# Altium PCB Smart Agriculture Board.PcbDoc
Units mil, origin at the board's own origin, x right, y up, seen from the top; angles counter-clockwise.
Board outline 6440 x 2515 mil, 2 copper layers (Top Layer, Bottom Layer); 39 components, 25 nets, 142 pads, 30 vias.
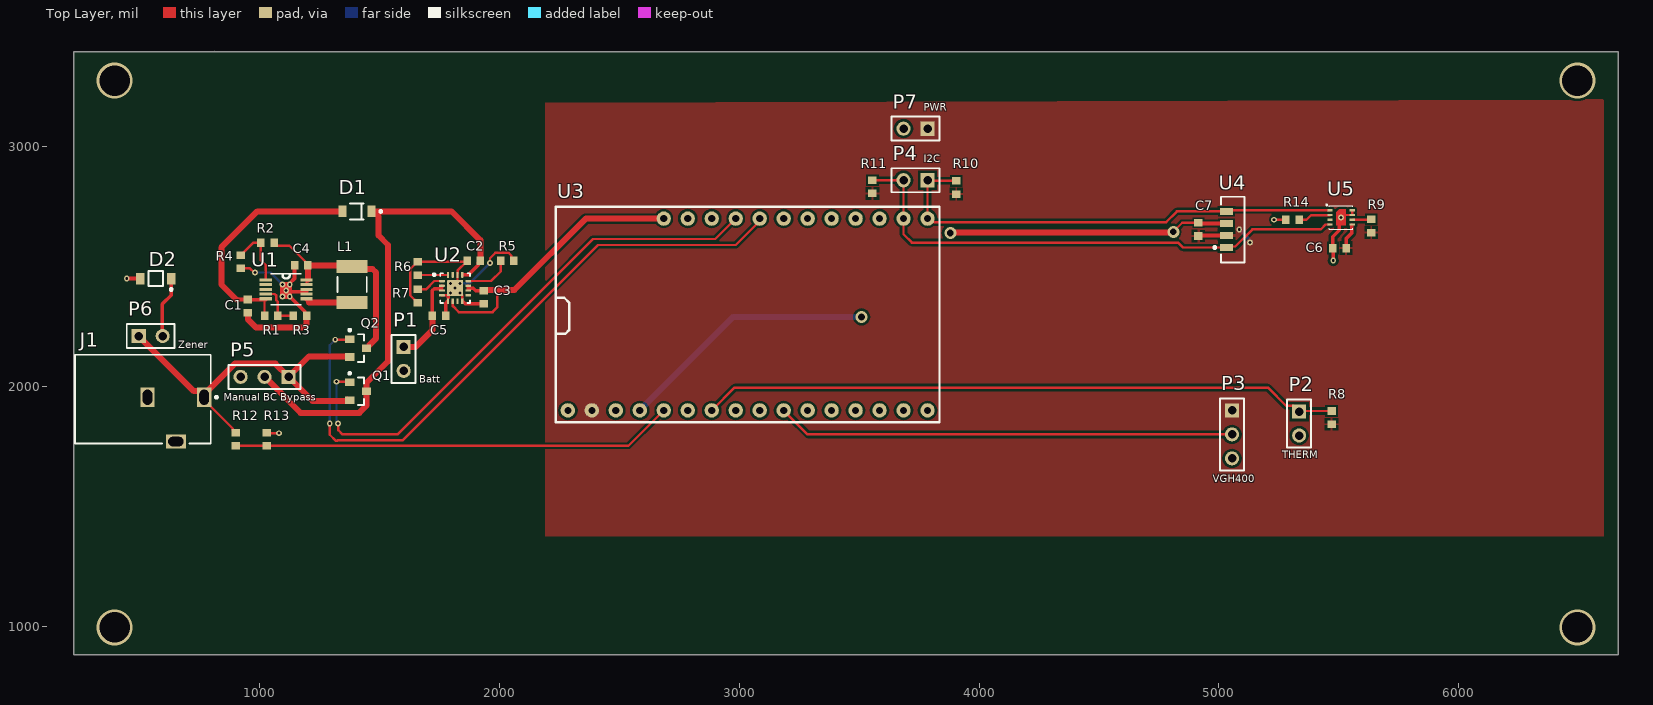
[diagram p0: Top Layer view]
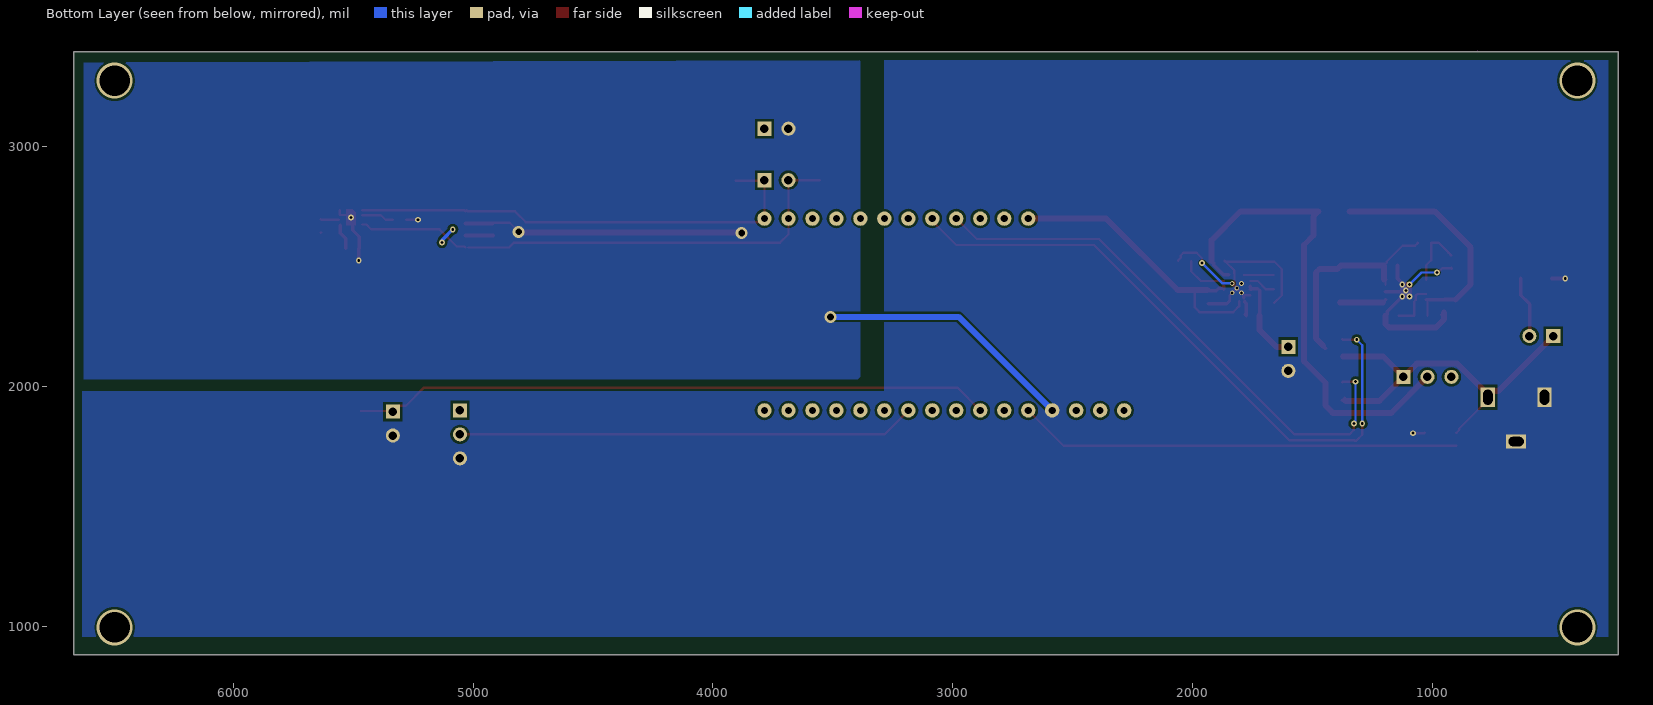
[diagram p1: Bottom Layer view, seen from below]

## Layer stack, top to bottom
Top Solder: solder mask 0.4, Solder Resist, Dk 3.5
Top Layer: signal copper 1.4
Dielectric 1: dielectric 12.6, FR-4, Dk 4.8
Bottom Layer: signal copper 1.4
Bottom Solder: solder mask 0.4, Solder Resist, Dk 3.5

## Board outline
225,880 6665,880 6665,3395 225,3395
cut-out: 810,3400

## Design rules (kind name [scope] priority, off if disabled: settings)
Clearance [All] p1: gap=10 ignorepadtopadclearanceinfootprint=FALSE except(0: Arc-Hole Track-Hole SMDPad-Hole THPad-Hole Via-Hole Fill-Hole Poly-Hole Region-Hole Text-Hole; 5: SMDPad-SMDPad; 8: Arc-SMDPad Track-SMDPad SMDPad-THPad SMDPad-Via SMDPad-Fill SMDPad-Poly SMDPad-Region SMDPad-Text)
HoleSize [All] p1: absolutevalues=TRUE maxlimit=247 minlimit=1 maxpercent=80.000 minpercent=20.000
MinimumSolderMaskSliver [All] p1: minsoldermaskwidth=2
PasteMaskExpansion [All] p1: expansion=2
PolygonConnect [All] p1: thpad.connectstyle=Direct thpad.reliefconductorwidth=10 thpad.reliefentries=4 thpad.polygonreliefangle="90 Angle" thpad.airgapwidth=10 smdpad.connectstyle=Relief smdpad.reliefconductorwidth=10 smdpad.reliefentries=4 smdpad.polygonreliefangle="90 Angle" smdpad.airgapwidth=10 via.connectstyle=Direct via.reliefconductorwidth=10 via.reliefentries=4 via.polygonreliefangle="90 Angle" via.airgapwidth=10
RoutingVias [All] p1: holewidth=28 width=50 viastyle="Through Hole" minholewidth=28 minwidth=50 maxholewidth=28 maxwidth=50
SilkToSilkClearance [All] p1: silktosilkclearance=3
SilkToSolderMaskClearance [IsPad] p1: minsilkscreentomaskgap=6 clearancetoexposedcopper=TRUE
SolderMaskExpansion [All] p1: expansion=2 istentingtop=FALSE
Width [All] p1: maxlimit=50 minlimit=5 preferedwidth=15 toplayer_prefwidth=10 bottomlayer_minwidth=10 minimp=50.000000 maximp=50.000000 favimp=50.000000
25 further rules are at their usual default settings.

## Components (designator, comment, footprint, x,y, rotation, side; value= is the part's Value field where it differs from the comment)
C1 "" 1608[0603] 950,2335 r90 top value=10uF
C2 "" 1608[0603] 1892.28,2524.68 r0 top value=1uF
C3 "" 1608[0603] 1934.72,2372.13 r90 top value=4.7uF
C4 "" 1608[0603] 1172.56,2505 r0 top value=10uF
C5 "" 1608[0603] 1747.44,2295 r180 top value=4.7uF
C6 "" 1608[0603] 5503.03,2576.98 r0 top value=100nF
C7 "" 1608[0603] 4915,2655 r270 top value=100nF
D1 "RB161MM-20TR" FP-PMDU-MFG 1405,2730 r180 top
D2 "MMSZ5233BT1G" ONSC-SOD-123-2-425-04_V 565.98,2450 r180 top
J1 "PJ-102B" CUI-PJ-102B_V 650,1955 r180 top
L1 "" 1812 1385,2425 r270 top value=4.7uH
P1 "Battery" HDR1X2 1600,2165 r270 top
P2 "Thermistor" HDR1X2 5335,1895 r270 top
P3 "VGH400" HDR1X3 5055,1900 r270 top
P4 "I2C Breakout" HDR1X2 3785,2860 r180 top
P5 "BC Manual Bypass" HDR1X3 1120,2040 r180 top
P6 "Zener Opt" HDR1X2 495,2210 r0 top
P7 "PWR Breakout" HDR1X2 3785,3075 r180 top
Q1 "IRLML6402" INTR-SOT-23-3_V 1410,1980 r270 top
Q2 "IRLML6402" INTR-SOT-23-3_V 1410,2160 r270 top
R1 "" 1608[0603] 1047.44,2295 r180 top value=1.5M
R2 "" 1608[0603] 1032.44,2600 r0 top value=4.7k
R3 "" 1608[0603] 1167.44,2295 r180 top value=360k
R4 "" 1608[0603] 920,2520 r90 top value=4.7k
R5 "" 1608[0603] 2032.28,2524.69 r180 top value=2.2k
R6 "" 1608[0603] 1659.72,2492.13 r270 top value=2.2k
R7 "" 1608[0603] 1659.72,2377.24 r90 top value=10k
R8 "" 1608[0603] 5470,1870 r270 top value=10k
R9 "" 1608[0603] 5635.59,2669.42 r270 top value=10k
R10 "" 1608[0603] 3905,2830 r270 top value=4.7k
R11 "" 1608[0603] 3555,2832.56 r270 top value=4.7k
R12 "Res1" 1608[0603] 900,1780 r90 top value=10k
R13 "Res1" 1608[0603] 1030,1780 r270 top value=10k
R14 "" 1608[0603] 5307.44,2695 r0 top value=10k
U1 "MCP16414-I/UN" MSOP10_UN_MCH 1110,2405 r0 top
U2 "BQ24074RGTR" RGT0016C_V 1814.84,2409.84 r0 top
U3 "Feather M0 LoRa" FeatherM0LoRa 2285,1900 r90 top
U4 "VEML7700-TR" FP-6_550-5300_02-4-MFG 5058.55,2654.41 r90 top
U5 "SHT3x-DIS" SHT3x 5510,2705 r0 top

## Footprints (in the part's own frame and the unit in brackets; to place one, negate y for a bottom-side part, rotate by r counter-clockwise, add the part's x,y. Pads: shape width x height; smd on the part's side, far side on the other; paste and mask are expansions set on the pad)
1608[0603] [mm] "Chip Capacitor, Body 1.6x0.8mm, IPC High Density"
  rect 0.8x0.9 smd: 1(-0.7,0) 2(0.7,0)
  body extent -0.87,-0.48 0.87,0.48, height 1.3
1812 [mm] "Chip Capacitor, Body 4.5x3.2mm, IPC High Density"
  rect 1.4x3.3 smd: 1(-1.9,0) 2(1.9,0)
  silkscreen extent -0.8,-1.55 0.8,1.55, body extent -2.4,-1.7 2.4,1.7, height 1.4
CUI-PJ-102B_V [mm] "THD, 3-Leads, Body 14.4x9mm, Height 11mm"
  rect 1.5x2.1 hole 1 slot 1.6 at 90 deg: 1(-3,0) 2(3,0)
  rect 2.1x1.5 hole 1 slot 1.6 at 0 deg: 3(0,4.7)
  silkscreen extent -4.43,-4.5 10.7,4.9, body extent -3.7,-4.5 10.7,4.9, height 11
FeatherM0LoRa [mil]
  round 60 hole 30: 1(0,0) 2(0,-100) 3(0,-200) 4(0,-300) 5(0,-400) 6(0,-500) 7(0,-600) 8(0,-700) 9(0,-800) 10(0,-900) 11(0,-1000) 12(0,-1100) 13(0,-1200) 14(0,-1300) 15(0,-1400) 16(0,-1500) 17(800,-1500) 18(800,-1400) 19(800,-1300) 20(800,-1200) 21(800,-1100) 22(800,-1000) 23(800,-900) 24(800,-800) 25(800,-700) 26(800,-600) 27(800,-500) 28(800,-400)
  silkscreen extent -50,-1550 850,50
FP-6_550-5300_02-4-MFG [mm]
  rect 0.7x1.4 smd paste+0 mask+0: 1(-1.905,0.675) 2(-0.635,0.675) 3(0.635,0.675) 4(1.905,0.675)
  silkscreen extent -3.47,-1.25 3.47,2.05, body extent -3.57,-1.35 3.57,1.48, height 0.25
FP-PMDU-MFG [mm]
  rect 0.85x1.2 smd paste+0 mask+0: 1(-1.525,0) 2(1.525,0)
  silkscreen extent -2.65,-0.85 0.72,0.85, body extent -2.05,-0.95 2.05,0.95, height 0.25
HDR1X2 [mm] "Connector; Header; 2 Position"
  rect 1.5x1.5 hole 0.9: 1(0,0)
  round 1.5 hole 0.9: 2(2.54,0)
  silkscreen extent -1.27,-1.27 3.81,1.27
HDR1X3 [mm] "Connector; Header; 3 Position"
  rect 1.5x1.5 hole 0.9: 1(0,0)
  round 1.5 hole 0.9: 2(2.54,0) 3(5.08,0)
  silkscreen extent -1.27,-1.27 6.35,1.27
INTR-SOT-23-3_V [mm] "SOT23, 3-Leads, Body 2.92x1.3mm, Pitch 1.9mm"
  rect 0.802x0.972 smd: 1(-0.95,-0.885) 2(0.95,-0.885) 3(0,0.885)
  silkscreen extent -2.03,-1.01 1.46,0.64, body extent -1.46,-0.65 1.46,0.65, height 1.12
MSOP10_UN_MCH [mil]
  rect 51.5x13 smd: 1(-84.75,39.37) 2(-84.75,19.68) 3(-84.75,0) 4(-84.75,-19.68) 5(-84.75,-39.37) 6(84.75,-39.37) 7(84.75,-19.68) 8(84.75,0) 9(84.75,19.68) 10(84.75,39.37)
  silkscreen extent -64,-64 64,64
ONSC-SOD-123-2-425-04_V [mm] "SOD, 2-Leads, Body 2.69x1.6mm"
  rect 0.91x1.22 smd: 1(-1.635,0) 2(1.635,0)
  silkscreen extent -1.76,-0.8 0.78,1.28, body extent -1.35,-0.8 1.35,0.8, height 1.35
RGT0016C_V [mm] "QFN, 16-Leads, Body 3x3mm, Pitch 0.5mm, Thermal Pad 1.65x1.65mm"
  rrect40% 0.6x0.25 smd: 1(-1.4,0.75) 2(-1.4,0.25) 3(-1.4,-0.25) 4(-1.4,-0.75) 9(1.4,-0.75) 10(1.4,-0.25) 11(1.4,0.25) 12(1.4,0.75)
  rrect40% 0.25x0.6 smd: 5(-0.75,-1.4) 6(-0.25,-1.4) 7(0.25,-1.4) 8(0.75,-1.4) 13(0.75,1.4) 14(0.25,1.4) 15(-0.25,1.4) 16(-0.75,1.4)
  rrect6% 1.55x1.55 on Top Paste: 17(0,0)
  rrect6% 1.7x1.7 smd paste-0.85 mask+0: 17(0,0)
  silkscreen extent -2.35,-1.57 1.57,1.58, body extent -1.5,-1.5 1.5,1.5, height 1
SHT3x [mm]
  rrect50% 0.55x0.25 smd paste+0 mask+0.05: 1(-1.175,0.75)
  rrect20% 0.55x0.25 smd paste+0 mask+0.05: 2(-1.175,0.25) 3(-1.175,-0.25) 4(-1.175,-0.75) 5(1.175,-0.75) 6(1.175,-0.25) 7(1.175,0.25) 8(1.175,0.75)
  round 0.2 smd mask+0.05: 9(0,0)
  Top Layer region: 0.5,-0.85 -0.5,-0.85 -0.5,0.55 -0.2,0.85 0.5,0.85
  silkscreen extent -1.55,-1.25 1.25,1.35, body extent -1.25,-1.25 1.25,1.25, height 0.9

## Part data
C1 C2 C3 C4 C5 C6 C7: library part Cap, "Capacitor", LatestRevisionDate=17-Jul-2002, LatestRevisionNote="Re-released for DXP Platform.", PackageDescription="Radial Cap, Thru-Hole; 2 Leads; 0.3 in Pin Spacing", PackageReference=RAD-0.3, Published=8-Jun-2000, Publisher="Altium Limited"
D1: library part CMP-08971-000004-1, "DIODE SCHOTTKY 25V 1A PMDU", Forward Current=1A, Manufacturer=Rohm, Max Junction Temp=+125°C, Max Repetitive Reverse Voltage=25V, Max Surge Forward Current=30A, Package=PMDU, Peak Reverse Current=280uA, Reverse Voltage=20V, Temperature="to +125°C", Automotive=No, Category=Diode, ComponentLink2Description=Datasheet, ComponentLink2URL=https://www.rohm.com/datasheet/RB161MM-20/rb161mm-20tr-e, Device Class L1="Discrete Semiconductors", Device Class L2=Diodes, Device Class L3="Schottky Diodes", Digikey Description="DIODE SCHOTTKY 25V 1A PMDU", Height=0.9mm, Lead Free=Yes, Manufacturer Part Number=RB161MM-20TR, Mouser Description="RB161MM Series 25 V 1 A Surface Mount Schottky Barrier Diode - SOD-123FL", Octopart=https://octopart.com/rb161mm-20tr-rohm-50255147, RoHS=TRUE, Temperature Range High=+125°C
D2: library part CMP-1060-00590-1, "Zener Voltage Regulator, 500 mW, 2-Pin SOD-123, Pb-Free, Tape and Reel", Manufacturer="On Semiconductor", ComponentLink1Description="Manufacturer URL", ComponentLink1URL=http://www.onsemi.com/, ComponentLink2Description=Datasheet, ComponentLink2URL=http://www.onsemi.com/pub_link/Collateral/MMSZ5221BT1-D.PDF, ComponentLink3Description="Package Specification", ComponentLink3URL=http://www.onsemi.com/pub_link/Collateral/425-04.PDF, DatasheetVersion="Rev. 12", Mounting Technology="Surface Mount", P Max (W)=0.5, PackageDescription="2-Pin SOD, Body 1.6 x 2.69 mm", PackageReference=SOD-123-2-425-04, PackageVersion="Rev. G, 10/2009", Packing="Tape and Reel", PartNumber=MMSZ5233BT1G, RoHS=Pb-Free, VZ Typ (V)=6.0
J1: library part CMP-2000-06900-1, "Through Hole Right Angle DC Power Jack, 2.5 A, 2.5 mm Center Pin, 3 Position, -25 to 85 degC, RoHS, Bulk", Current Rating=2.5A, Flammability Rating=UL94V-0, Insulation Resistance=100MOhms, Manufacturer=CUIInc., Operating Temperature Range=-25Cto+85C, Package Description="3-Pin Through Hole Device, Body 14.4 x 9 mm, Height 11 mm", Voltage Rating=24V, Brand=CUI, Connector Type=DCPowerJack, Contact Gender=Male, Contact Material=Copper, Contact Plating=Nickel, Datasheet URL=http://www.cui.com/product/resource/pj-102b.pdf, Datasheet Version="Rev. 1.03, 04/2016", Factory Pack Quantity=280, Housing Material=PolybutyleneTerephthalate(PBT), Inside Contact Diameter=2.5mm, Manufacturer URL=http://www.cui.com/, Mounting Angle=Right, Mounting Style=ThroughHole, Mounting Technology=ThroughHole, Outside Contact Diameter=6.5mm, Package Reference=PJ-102B, Packaging=Bulk, Product=Jacks, Product Category=DCPowerConnectors, RoHS=True, Termination Style=ThroughHole
L1: library part Inductor, "Inductor", Code_IEC=1005, Code_JEITA=0402, LatestRevisionDate=29-May-2009, LatestRevisionNote="IPC-7351 Footprint Added.", PackageDescription="Chip Inductor", PackageReference=0402-A, Published=8-Jun-2000, Publisher="Altium Limited"
P1 P2 P4 P6 P7: library part "Header 2", "Header, 2-Pin", LatestRevisionDate=17-Jul-2002, LatestRevisionNote="Re-released for DXP Platform.", Publisher="Altium Limited"
P3 P5: library part "Header 3", "Header, 3-Pin", LatestRevisionDate=17-Jul-2002, LatestRevisionNote="Re-released for DXP Platform.", Publisher="Altium Limited"
Q1 Q2: library part CMP-2000-04987-1, "HEXFET(R) Power P-Channel MOSFET, -20 V, -3.7 A, -55 to 150 degC, 3-Pin SOT-23, RoHS, Tape and Reel", Drain-Source On Resistance-Max=0.065O, Drain-to-Source Voltage [Vdss]=20V, Manufacturer="International Rectifier", Package Description="3-Pin Small Outline Transistor, Body 2.92 x 1.3 mm, Pitch 0.95 mm", Package Reference=SOT-23-3, Rated Power Dissipation=1.3W, Channel Type=P-Channel, Datasheet URL=http://datasheet.octopart.com/IRLML6402TRPBF-International-Rectifier-datasheet-93882.pdf, Datasheet Version=Feb-05, Manufacturer URL=http://internationalrectifier.com/, Qg Gate Charge=8nC
R1 R2 R3 R4 R5 R6 R7 R8 R9 R10 R11 R14: library part Res1, "Resistor", LatestRevisionDate=17-Jul-2002, LatestRevisionNote="Re-released for DXP Platform.", PackageDescription="Axial Device, Thru-Hole; 2 Leads; 0.3 in Pin Spacing", PackageReference=AXIAL-0.3, Published=8-Jun-2000, Publisher="Altium Limited"
R12 R13: "Resistor", LatestRevisionDate=17-Jul-2002, LatestRevisionNote="Re-released for DXP Platform.", PackageDescription="Axial Device, Thru-Hole; 2 Leads; 0.3 in Pin Spacing", PackageReference=AXIAL-0.3, Published=8-Jun-2000, Publisher="Altium Limited"
U1: library part Component_1
U2: library part CMP-0321-00220-2, "USB-Friendly Li-Ion Battery Charger and Power-Path Management IC, 10.5 V OVP, 4.3 V, -40 to 85 degC, 16-pin QFN (RGT), Green (RoHS & no Sb/Br)", Manufacturer="Texas Instruments", Over Voltage Protection=N, Code_JEDEC=MO-220, ComponentLink1Description=Datasheet, ComponentLink1URL=http://www.ti.com/general/docs/lit/getliterature.tsp?genericPartNumber=BQ24074&fileType=pdf, DatasheetVersion=SLUS810G, Eco-Plan="Green (RoHS & no Sb/Br)", Lead Acid=N, Li-Ion=N, Li-Polymer=N, Mounting Technology="Surface Mount", NiCd=N, NiMH=N, PackageDescription="16-Pin Plastic Quad Flat No-Lead, 3 x 3 mm Body, 0.5 mm Pitch, 1.7 x 1.7 mm Exposed Pad", PackageReference=RGT0016C, PackageVersion="revH, Oct-2011", PartNumber=BQ24074RGTR, SubFamily="Battery Charge Management", Vin(Min)(V)=4.3
U4: library part CMP-02530-000005-1, "SENSOR OPT 545NM AMBIENT 4SMD", Ambient Temperature Range High=+85°C, Ambient Temperature Range Low=-25°C, Manufacturer=Vishay, Max Junction Temp=+100°C, Max Supply Voltage=3.6V, Min Supply Voltage=2.5V, Operating Supply Current=2-45uA, Package=6.550-5300.02-4, Temperature="to +100°C", Automotive=No, Category=IC, ComponentLink2Description=Datasheet, ComponentLink2URL=http://www.vishay.com/docs/84286/veml7700.pdf, Device Class L1=Sensors, Device Class L2="Optical Sensors", Device Class L3=unset, Digikey Description="SENSOR OPT 545NM AMBIENT 4SMD", Height=3.15mm, Lead Free=Yes, Manufacturer Part Number=VEML7700-TR, Octopart=https://octopart.com/veml7700-tr-vishay-70519713, RoHS=TRUE, Sensor Output=I2C, Temperature Range High=+100°C

## Via types
v1: diameter 24, hole 12, Top Layer to Bottom Layer, tented both sides, 17 vias
v2: diameter 19.68, hole 11.81, Top Layer to Bottom Layer, 5 vias
v3: diameter 150, hole 128, Top Layer to Bottom Layer, 4 vias
v4: diameter 50, hole 28, Top Layer to Bottom Layer, tented both sides, 3 vias
v5: diameter 24, hole 12, Top Layer to Bottom Layer, 1 vias

## Nets (pads, with @x,y where several pads share a name; then routed paths per layer and width w, separated by ;. In a path a pad name is that pad's centre, name@x,y a point inside that pad or via, vN(x,y) a via of type N, cw(c..) or ccw(c..) an arc to the next point about the centre after c; other vN are vias at no path point)
3V3: C6.2 C7.2 P3.1 P7.1 R8.2 R9.2 R10.2 R11.2 U3.2 U4.2 U5.5 | length 300.3
  Top Layer w10: C7.2 C7.2@4916.97,2629.41 ; R9.2@5633.62,2641.86 R9.2 R9.2@5635,2641.27
  Top Layer w15: C7.2@4916.97,2629.41 U4.2 ; C6.2 5530.59,2615.59 5555,2640 U5.5@5555,2672.89
  Bottom Layer w15: v1(5085,2655) 5128.28,2611.72 5128.28,2601.72 v1(5130,2600)
GND: C1.1 C2.1 C3.1 C4.1 C5.1 C6.1 C7.1 D2.2 J1.2 J1.3 P1.2 P2.2 P3.3 P7.2 R3.1 R4.1 R5.1 R6.1 R7.1 R13.1 R14.1 U1.7 U1.8 U2.4 U2.5 U2.8 U2.14 U2.17@1814.84,2409.84 U3.4 U4.3 U5.7 U5.8 U5.9 | length 4663.8
  Top Layer w10: R4.1 959.26,2492.44 976.7,2475 v1(980,2475) ; R13.1 1032.56,1805 v1(1080,1805) ; R7.1 1657.76,2349.69 1627.01,2380.43 1627.01,2488.94 1657.76,2519.69 R6.1 C2.1@1861.69,2519.69 ; U2.4 1785.32,2380.32 v2(1795.16,2390.16) v2(1814.84,2409.84) ; U2.17@1824.68,2419.68 U2.14 1824.68,2471.69 1825,2472.01 1825,2482.99 C2.1@1861.69,2519.69 ; v2(1834.53,2390.16) 1844.29,2380.39 1844.29,2354.8 U2.8 ; C2.1 1864.72,2522.72 C2.1@1861.69,2519.69 ; v1(1960,2515) 1960,2534.64 1982.76,2557.4 2037.6,2557.4 2049.09,2545.91 2049.09,2535.43 R5.1 ; v4(3880,2640) v4@3882.5,2642.5 ; v4@4807.5,2642.5 v4(4810,2645) 4847.56,2682.56 C7.1 C7.1@4918.15,2679.41 ; v1(5230,2695) R14.1 ; C6.1 C6.1@5477.2,2575.24 ; v1(5510,2705) 5519.84,2714.84 U5.7 U5.8
  Top Layer w15: v1(445,2450) D2.2 ; C1.1 951.97,2307.44 960.22,2299.19 C1.1@960.22,2298.79 ; v5@1110.68,2400.68 v5(1110,2400) 1115,2395 1194.75,2395 ; v1(1125,2375) 1186.75,2313.25 1186.75,2303.25 R3.1 ; v1(1125,2425) 1125,2430 1145,2450 C4.1 ; C5.1@1780.14,2300.14 C5.1 1775,2344.65 1782.5,2352.15 U2.5@1782.5,2354.72 ; 1785.31,2370 U2.17@1785.31,2380.31 ; U2.17@1824.68,2419.68 v2(1814.84,2409.84) v2(1834.53,2390.16) ; U2.8@1847.11,2354.72 1857.26,2344.57 C3.1 ; C7.1@4918.15,2679.41 U4.3 ; C6.1 5475.47,2624.12 5502.79,2651.45 5502.79,2689.04 5507.81,2694.06 5507.81,2702.82 v1(5510,2705) ; v1(5477.2,2524.7) C6.1@5477.2,2575.24
  Top Layer w25: C1.1 950,2280 985,2245 1180,2245 1195,2260 R3.1 ; v4@3882.5,2642.5 v4@4807.5,2642.5
  Bottom Layer w10: v1(980,2475) 1045,2475 v1(1095,2425) ; v2(1834.53,2429.53) 1874.53,2429.53 v1(1960,2515)
  Bottom Layer w25: U3.4 2975,2290 v4(3510,2290)
  other v1: 1095,2375
  other v2: 1795.16,2429.53
NetC1_2: C1.2 D1.2 R1.2 U1.5 | length 1002.3
  Top Layer w10: R1.2 1019.88,2355.95 U1.5@1025.25,2361.32
  Top Layer w15: 902.44,2362.56 C1.2 951.24,2361.32 U1.5@1025.25,2361.32
  Top Layer w25: 902.44,2362.56 840,2425 840,2580 990,2730 D1.2
NetC2_2: C2.2 D1.1 P5.2 Q1.3 U2.13 | length 2054.2
  Top Layer w15: Q1.3 Q1.3@1445,1980.16 ; 1849.68,2464.96 1870,2464.96 1911.59,2506.56 1911.59,2516.44 C2.2
  Top Layer w25: P5.2 1170,1890 1415,1890 1444.84,1919.84 Q1.3 ; Q1.3@1445,1980.16 1445,2015 1535,2105 1535,2590 1495,2630 1495,2709.41 1474.72,2729.69 1800.31,2729.69 1919.84,2610.16 C2.2@1919.84,2522.72
NetC3_2: C3.2 U2.6 U2.10 U2.11 U3.28 | length 1254.2
  Top Layer w10: U2.6 1805.24,2354.49 1805.24,2334.76 1830,2310 1970.86,2310 1990,2329.14 1990,2402.58 ; 1869.96,2405 1874.96,2410
  Top Layer w15: 1869.96,2405 U2.11@1869.96,2416.95 ; 1874.96,2410 1890,2410 1900.31,2399.69 C3.2 C3.2@1937.62,2402.58
  Top Layer w25: C3.2@1937.62,2402.58 1990,2402.58 2062.58,2402.58 2360,2700 U3.28
NetC4_2: C4.2 L1.1 Q2.3 R2.2 U1.9 U1.10 | length 899.5
  Top Layer w10: R2.2 1060,2598.03 1070.75,2587.28 1122.72,2587.28 1189.37,2520.63 1189.37,2515.75 C4.2 ; U1.9 U1.10
  Top Layer w15: U1.10 1199.12,2444.37 U1.10@1200.12,2445.37 ; L1.1@1379.8,2505 L1.1 ; Q2.3 1448.19,2160 1456.48,2168.29 Q2.3@1456.48,2171.63
  Top Layer w25: U1.10@1200.12,2445.37 C4.2 L1.1@1379.8,2505 ; L1.1 1395.2,2489.61 1470.36,2489.61 1485,2474.96 1485,2200.16 Q2.3@1456.48,2171.63
NetC5_2: C5.2 P1.1 U2.2 U2.3 | length 366.2
  Top Layer w15: C5.2 1719.88,2399.88 1727.5,2407.5 1752.22,2407.5 1754.41,2405.32 1759.72,2405.32 ; 1754.24,2410.8 1759.72,2416.29 U2.2@1759.72,2416.95
  Top Layer w25: P1.1 1650,2165 1719.88,2234.88 C5.2
NetD2_1: D2.1 P6.2 | length 255.9
  Top Layer w10: P6.2@593.48,2211.52 P6.2
  Top Layer w15: P6.2@593.48,2211.52 593.48,2343.48 630.35,2380.35 D2.1
NetJ1_1: J1.1 P5.1 P6.1 Q1.2 Q2.2 R12.2 | length 1609.5
  Top Layer w10: J1.1 768.11,1943.19 887.28,1824.02 887.28,1818.31 898.03,1807.56 R12.2
  Top Layer w15: J1.1@746.08,1980.13 J1.1@768.11,1958.1 ; J1.1 J1.1@768.11,1958.1 ; J1.1@768.11,1966.81 J1.1@768.11,1958.1 ; Q1.2@1364.35,1950.89 1372.64,1942.6 Q1.2 ; Q2.2@1372.76,2125 Q2.2
  Top Layer w25: P6.1 724.87,1980.13 J1.1@746.08,1980.13 ; J1.1@768.11,1966.81 896.3,2095 1065,2095 P5.1 ; Q1.2@1362.23,1940 1220,1940 P5.1 ; Q2.2@1372.76,2125 1205,2125 P5.1
NetL1_2: L1.2 U1.6 | length 194.9
  Top Layer w15: U1.6@1194.75,2361.32 1205.87,2350.2
  Top Layer w25: 1205.87,2350.2 L1.2
NetP2_1: P2.1 R8.1 U3.7 | length 2666.8
  Top Layer w10: U3.7 2980,1995 5205,1995 5280.47,1919.53 5310.47,1919.53 P2.1 5337.56,1897.56 R8.1
NetP3_2: P3.2 U3.10 | length 1911.4
  Top Layer w10: U3.10 3285,1800 P3.2
NetP4_1: P4.1 R10.1 U3.17 U4.4 U5.1 | length 1991.1
  Top Layer w10: R10.1 3787.44,2857.56 P4.1 U3.17 3798.53,2700 3813.53,2685 4780,2685 4825,2730 5021.39,2730 5026.39,2735 U4.4 5037.09,2734.53 U5.1
NetP4_2: P4.2 R11.1 U3.18 U4.1 U5.4 | length 2185.4
  Top Layer w10: R11.1 3555.12,2860 P4.2 U3.18 3685,2635 3720,2600 4830,2600 4850.59,2579.41 U4.1@5020.8,2579.41 ; U4.1 5036.24,2583.68 5068.68,2583.68 5140,2655 5425,2655 5445.47,2675.47 U5.4
NetQ1_1: Q1.1 U3.25 | length 2299.4
  Top Layer w10: v1(1320,2020) 1372.56,2020 Q1.1 ; v1(1326.65,1845) 1327,1844.65 1327,1818 1345,1800 1575,1800 2390,2615 2900,2615 U3.25
  Bottom Layer w10: v1(1320,2020) 1320,1855.44 1326.65,1848.79 v1(1326.65,1845)
NetQ2_1: Q2.1 U3.24 | length 2660.2
  Top Layer w10: v1(1291.65,1845) 1291.65,1798.35 1315.86,1774.14 1324.14,1774.14 1325,1775 1595,1775 2410,2590 2985,2590 3085,2690 U3.24 ; v1(1315,2195) 1372.76,2195 Q2.1
  Bottom Layer w10: v1(1291.65,1845) 1291.65,2171.65 v1(1315,2195)
NetR1_1: R1.1 R3.2 U1.4 | length 197.4
  Top Layer w10: U1.4 1062.14,2385.32 1068,2379.46 1068,2360.79 1075,2353.79 R1.1 R3.2
NetR2_1: R2.1 R4.2 U1.1 | length 269.5
  Top Layer w10: R4.2 921.97,2547.56 932.72,2558.31 932.72,2558.58 974.13,2600 R2.1 1004.88,2526.21 1025.25,2505.84 U1.1@1025.25,2446.19 ; U1.1@1024.94,2444.68 U1.1
NetR5_2: R5.2 U2.12 | length 194.4
  Top Layer w10: U2.12@1869.96,2439.61 1964.61,2439.61 2004.72,2479.72 R5.2@2004.72,2522.72
NetR6_2: R6.2 U2.16 | length 125.5
  Top Layer w10: R6.2@1659.72,2464.69 1784.8,2464.69 U2.16@1785.08,2464.96
NetR7_2: R7.2 U2.1 | length 114.4
  Top Layer w10: R7.2 1692.98,2404.8 1727.79,2439.61 U2.1@1759.72,2439.61
NetR9_1: R9.1 U5.6 | length 76.5
  Top Layer w10: U5.6@5559.95,2694.84 5560.11,2695 5633.61,2695 R9.1
NetR12_1: R12.1 R13.2 U3.5 | length 1846.1
  Top Layer w10: R12.1 R13.2 2537.44,1752.44 U3.5
NetR14_2: R14.2 U5.2 | length 136.8
  Top Layer w10: R14.2 5365.75,2695 5385.28,2714.53 U5.2@5463.74,2714.53
NetU5_3: U5.3
pads on no net: P5.3 U1.2 U1.3 U2.7 U2.9 U2.15 U2.17@1814.84,2409.84 U3.1 U3.3 U3.6 U3.8 U3.9 U3.11 U3.12 U3.13 U3.14 U3.15 U3.16 U3.19 U3.20 U3.21 U3.22 U3.23 U3.26 U3.27
copper on no net:
  other v3: 395,995 6495,995 395,3275 6495,3275

## Polygon pours and split planes (outlines as drawn)
GND on Bottom Layer "GND_L02_P002" (solid, pour order 2): 265,3360 265,955 6630,955 6630,1980 3285,1980 3285,3360
GND on Bottom Layer "GND_L02_P003" (solid, pour order 3): 3385,3360 3385,2040 3395,2030 6625,2030 6625,3350.87
3V3 on Top Layer "3V3_L01_P001" (solid, remove dead copper, pour order 1): 2190,3182.81 2190,1375 6605,1375 6605,3197.17

## Other copper
Top Layer:
  rectangle net GND: 1085,2365 1135,2435

## Silkscreen, mask and mechanical layers (free items; w line width, h text height)
Top Overlay:
  lines w10: 1095,2465 ccw(c1110,2465) 1110,2450 ccw(c1110,2465) 1125,2465
  text "PWR" at 3770,3150 h30
  text "I2C" at 3770,2935 h30
  text "Zener" at 660,2160 h30
  text "Batt" at 1665,2015 h30
  text "Manual BC Bypass" at 850,1940 h30
  text "THERM" at 5265,1700 h30
  text "VGH400" at 4975,1600 h30
Mechanical 1:
  lines w10: 220,880 6655,880 6655,3395 220,3395 220,880